# EAGLE board Qwiic_GPIO-Panel (EAGLE 9.4.2), part 1 of 4
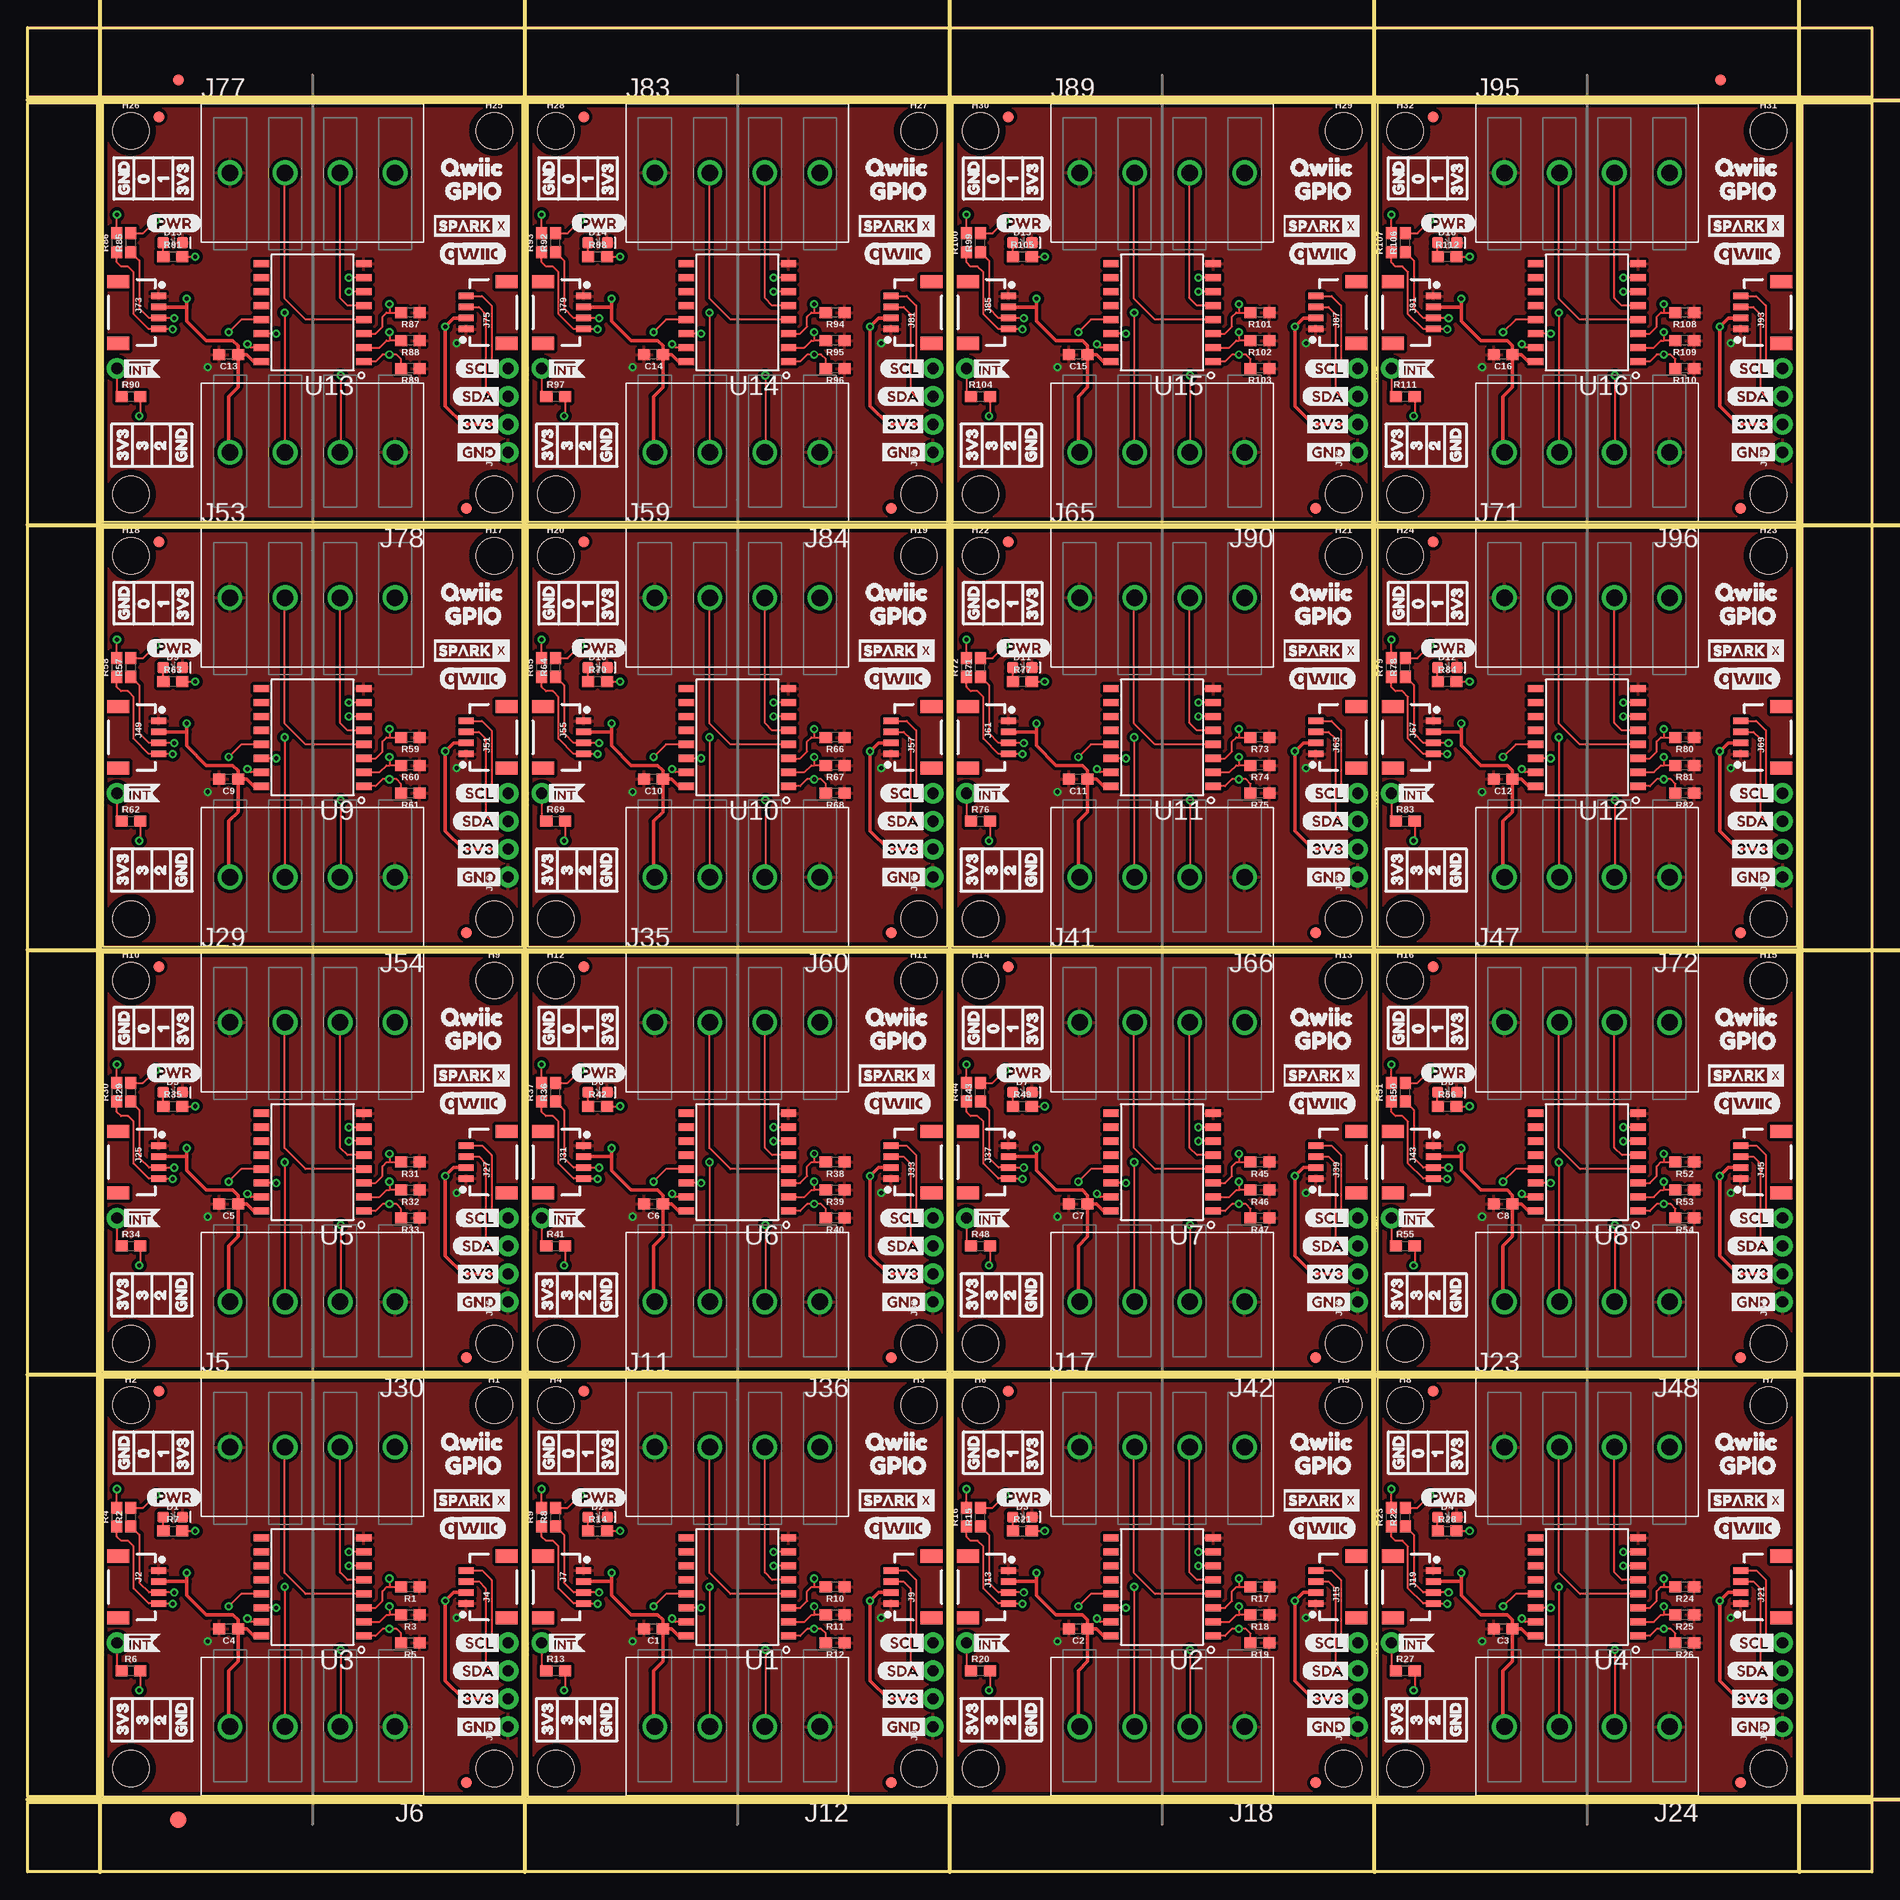
[diagram p0: board, top side]
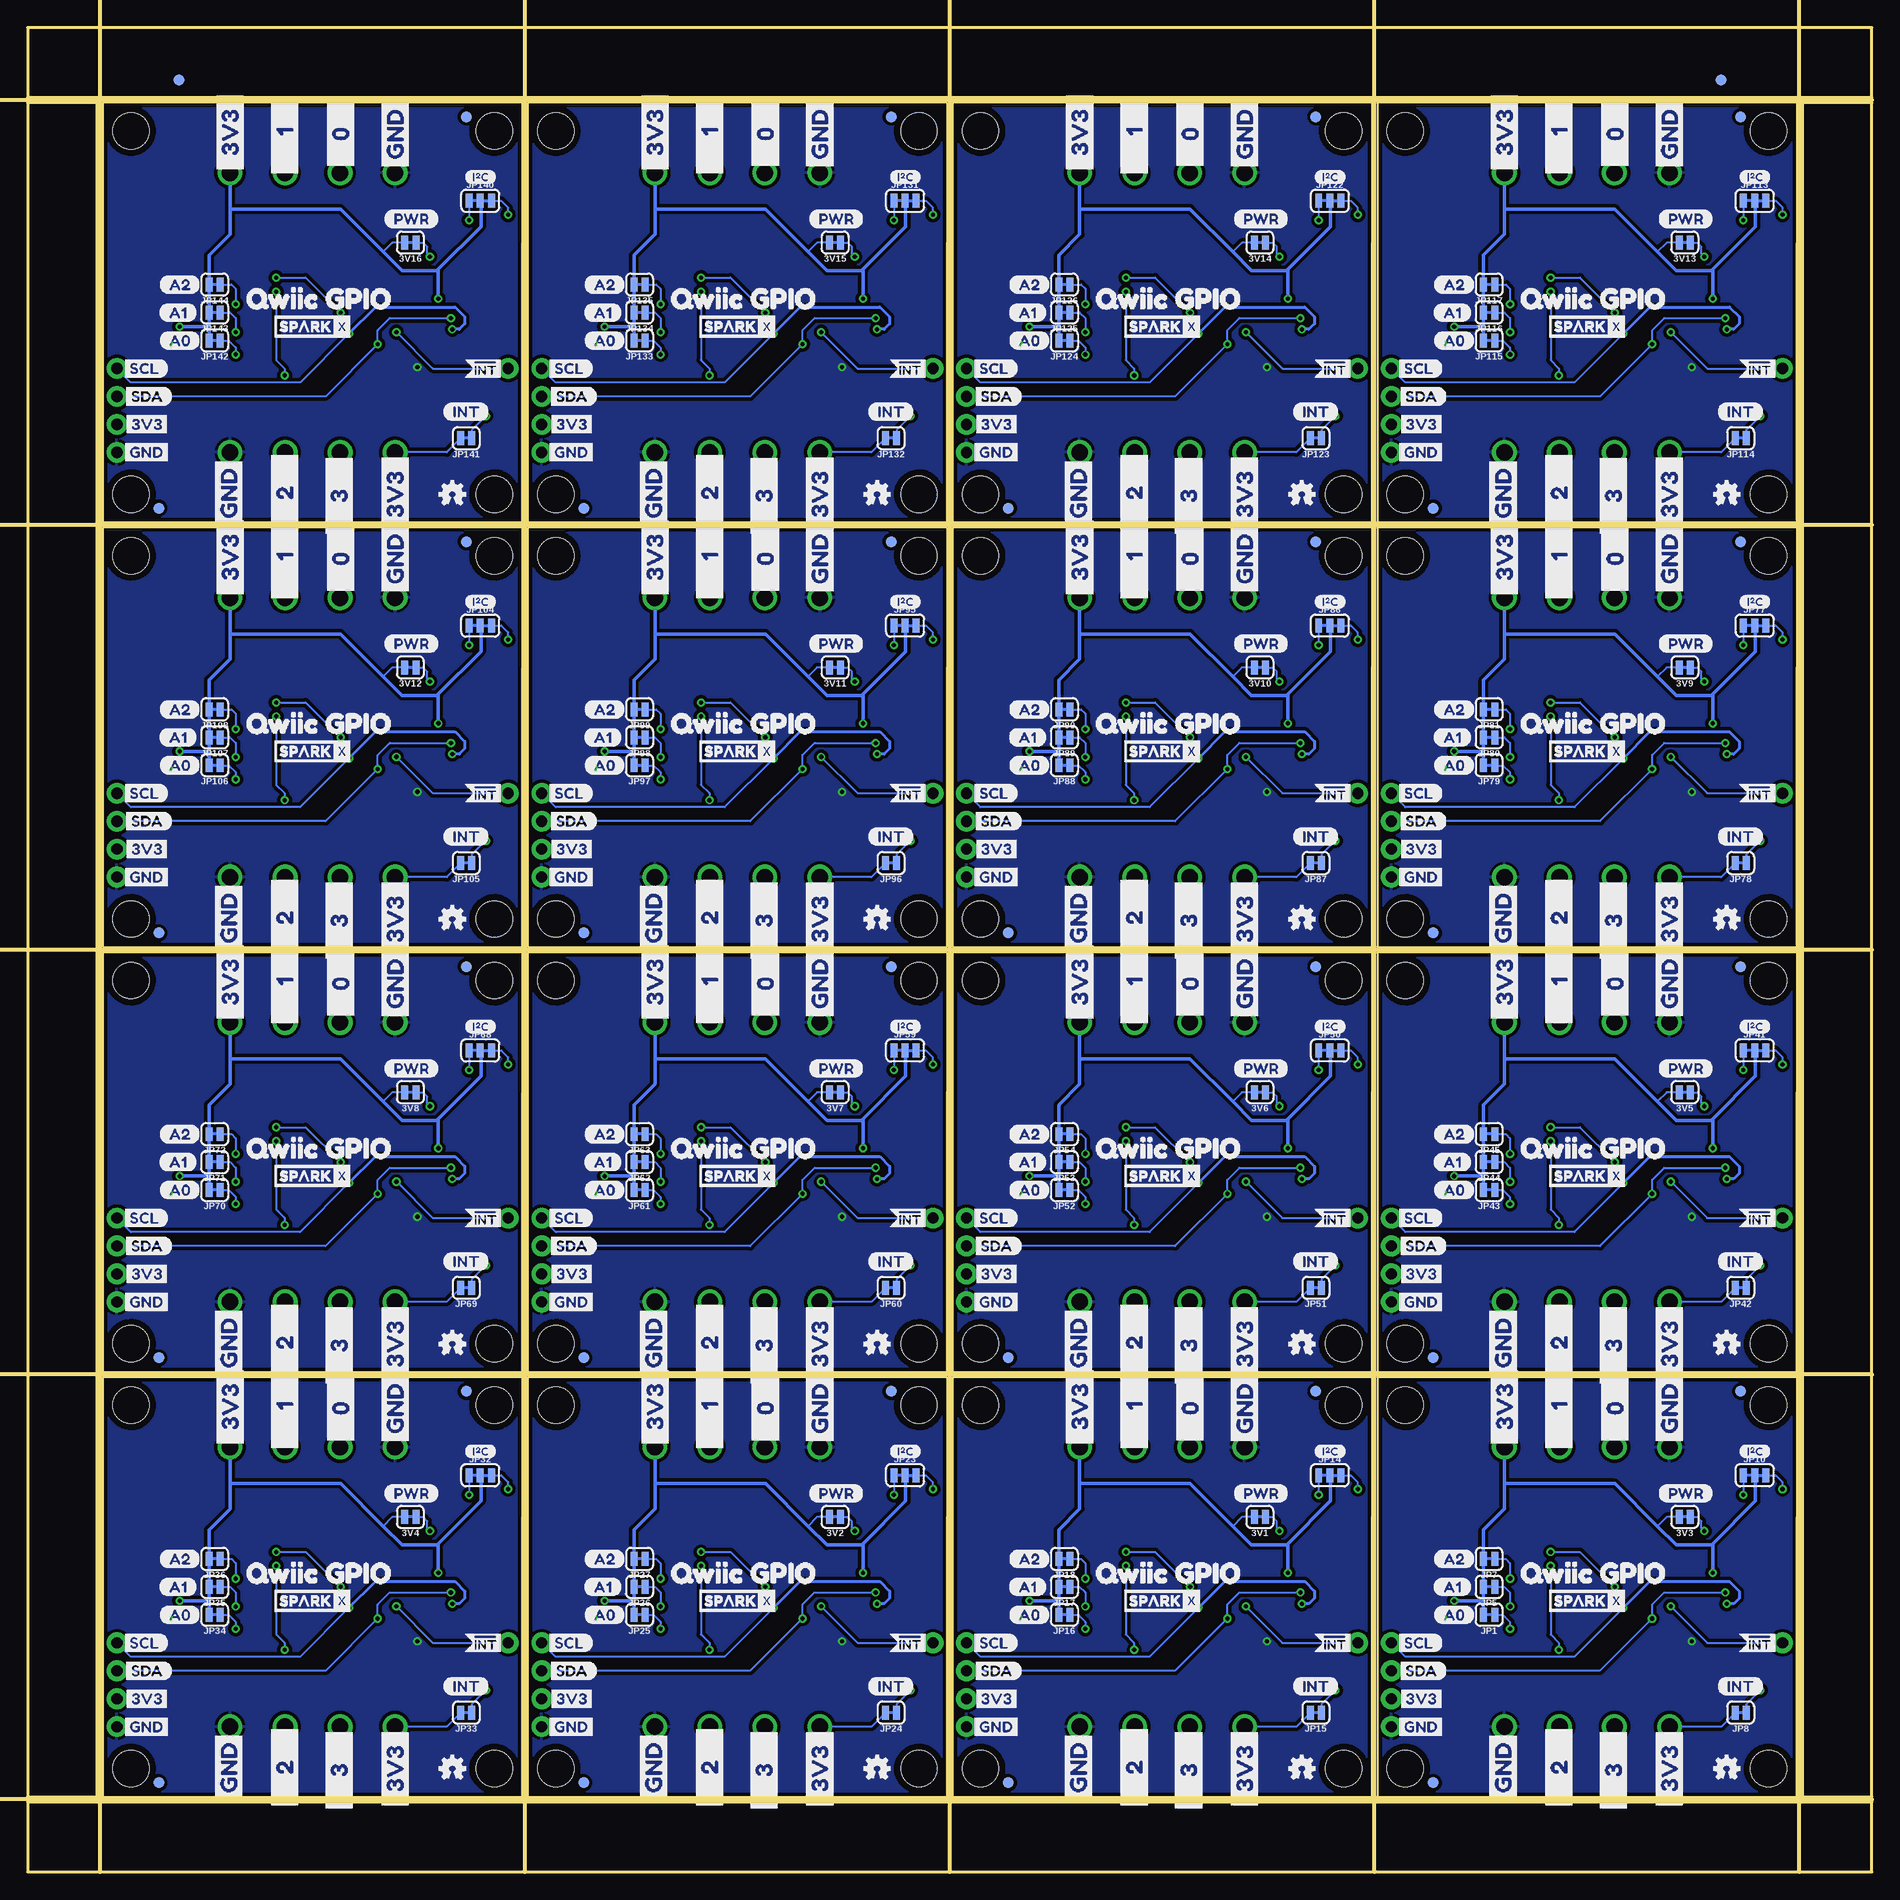
[diagram p1: board, bottom side, seen from below]

Size 167.64 x 167.64 mm. Coordinates in mm from the lower left corner, seen from the top.
Outline: 6.86,44.96 44.96,44.96 44.96,6.86 6.86,6.86 6.86,44.96
Outline: 45.47,44.96 83.57,44.96 83.57,6.86 45.47,6.86 45.47,44.96
Outline: 84.07,44.96 122.17,44.96 122.17,6.86 84.07,6.86 84.07,44.96
Outline: 122.68,44.96 160.78,44.96 160.78,6.86 122.68,6.86 122.68,44.96
Outline: 6.86,83.57 44.96,83.57 44.96,45.47 6.86,45.47 6.86,83.57
Outline: 45.47,83.57 83.57,83.57 83.57,45.47 45.47,45.47 45.47,83.57
Outline: 84.07,83.57 122.17,83.57 122.17,45.47 84.07,45.47 84.07,83.57
Outline: 122.68,83.57 160.78,83.57 160.78,45.47 122.68,45.47 122.68,83.57
Outline: 6.86,122.17 44.96,122.17 44.96,84.07 6.86,84.07 6.86,122.17
Outline: 45.47,122.17 83.57,122.17 83.57,84.07 45.47,84.07 45.47,122.17
Outline: 84.07,122.17 122.17,122.17 122.17,84.07 84.07,84.07 84.07,122.17
Outline: 122.68,122.17 160.78,122.17 160.78,84.07 122.68,84.07 122.68,122.17
Outline: 6.86,160.78 44.96,160.78 44.96,122.68 6.86,122.68 6.86,160.78
Outline: 45.47,160.78 83.57,160.78 83.57,122.68 45.47,122.68 45.47,160.78
Outline: 84.07,160.78 122.17,160.78 122.17,122.68 84.07,122.68 84.07,160.78
Outline: 122.68,160.78 160.78,160.78 160.78,122.68 122.68,122.68 122.68,160.78
Outline: 0,6.35 167.64,6.35 167.64,0 0,0 0,6.35
Outline: 161.29,160.78 167.64,160.78 167.64,6.86 161.29,6.86 161.29,160.78
Outline: 0,167.64 167.64,167.64 167.64,161.29 0,161.29 0,167.64
Outline: 0,160.78 6.35,160.78 6.35,6.86 0,6.86 0,160.78
Copper layers (1*16): Top 0.035mm / dielectric 1.5mm / Bottom 0.035mm
Design rules "Qwiic_GPIO": minimum track width 6mil, minimum drill 12mil, track to track 6mil, track to pad 6mil, pad to pad 6mil, via to via 6mil, smd to smd 6mil, copper to edge 6mil, drill to drill 6mil, minimum pad ring 7mil, minimum via ring 7mil, stop-mask expansion 4mil, vias tented up to drill 25mil, thermal gap 10mil
Milling: 10 lines

## Footprints (pad centres in the part's own frame; a part is rotated, then mirrored left to right if it is on the bottom)
SMT-JUMPER_2_NC_TRACE_SILK = smd 0.635 x 1.27: 1 -0.508,0; 2 0.508,0
0603 = smd 1.1 x 1: 1 -0.85,0; 2 0.85,0
LED-0603 = smd 1 x 1: A -0.877,0; C 0.877,0
FIDUCIAL-1X2 = smd 1 x 1: 1 0,0
FIDUCIAL-1.5X3 = smd 1.5 x 1.5: 1 0,0
STAND-OFF = hole 3.302: 0,0
1X01_NO_SILK = drill 1.016 pad 1.88: 1 0,0
1X04_1MM_RA = smd 0.6 x 1.35: 1 -1.5,0; 2 -0.5,0; 3 0.5,0; 4 1.5,0 | smd 1.2 x 2: NC1 2.8,-3.675; NC2 -2.8,-3.675
1X04_NO_SILK = drill 1.016 pad 1.88: 1 0,0; 2 2.54,0; 3 5.08,0; 4 7.62,0
LATCHTERMINAL-5MM-4 = drill 1.5: 1 -7.5,0; 2 -2.5,0; 3 2.5,0; 4 7.5,0
SMT-JUMPER_3_2-NC_TRACE_SILK = smd 0.635 x 1.27: 1 -1.016,0; 2 0,0; 3 1.016,0
16SOIC = smd 1.397 x 0.648: 1 -4.65,4.445; 2 -4.65,3.175; 3 -4.65,1.905; 4 -4.65,0.635; 5 -4.65,-0.635; 6 -4.65,-1.905; 7 -4.65,-3.175; 8 -4.65,-4.445; 9 4.65,-4.445; 10 4.65,-3.175; 11 4.65,-1.905; 12 4.65,-0.635; 13 4.65,0.635; 14 4.65,1.905; 15 4.65,3.175; 16 4.65,4.445